# Altium PCB MPPT_V1.0.1.PcbDoc (part 2 of 2)
Units mm, origin at the board's own origin, x right, y up, seen from the top; angles counter-clockwise.
Board outline 82 x 82 mm, 4 copper layers (Top Layer, GND Plane, PWR Plane, Bottom Layer), stack 1.641 mm thick; 90 components, 70 nets, 305 pads, 127 vias.
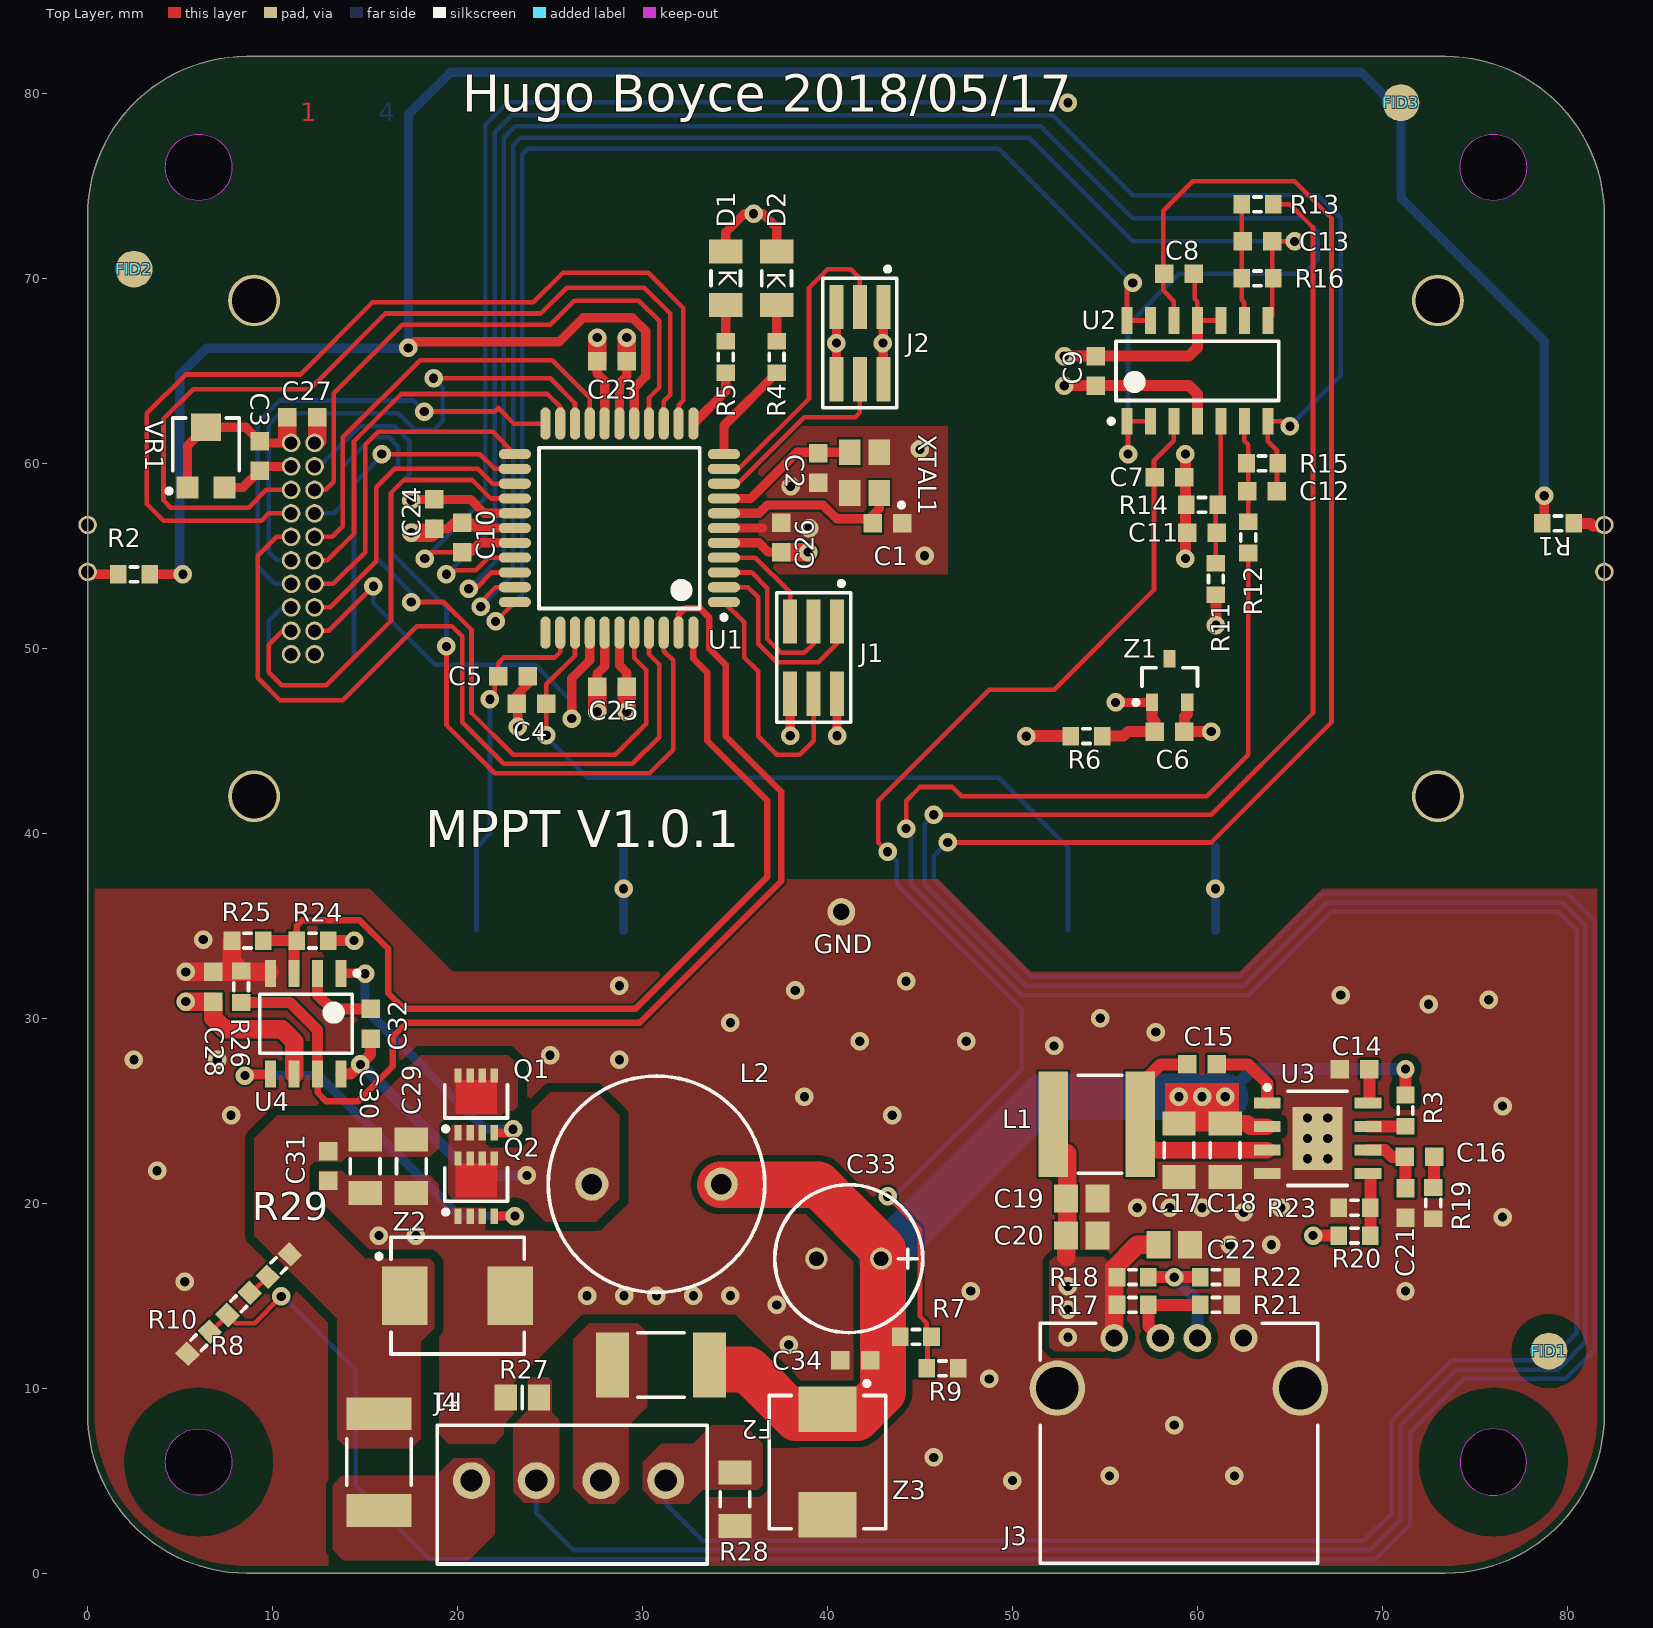
[diagram p0: Top Layer view]

## Via types
v1: diameter 1, hole 0.5, Top Layer to Bottom Layer, tented both sides, 127 vias

## Nets (pads, with @x,y where several pads share a name; then routed paths per layer and width w, separated by ;. In a path a pad name is that pad's centre, name@x,y a point inside that pad or via, vN(x,y) a via of type N, cw(c..) or ccw(c..) an arc to the next point about the centre after c; other vN are vias at no path point) (continued)
NetC15_1: (continued)
  Top Layer w0.9: L1.2@57,23 57.5,23 57.635,22.865 U3.3
NetC15_2: C15.2 U3.1 | length 4.2
  Top Layer w0.65: C15.2 62.75,27.5 63.775,26.475 U3.1
NetC16_1: C16.1 C21.1 U3.6 | length 3.8
  Top Layer w0.65: U3.6 70.146,22.865 70.511,22.5 C16.1 71.25,22.45 C21.1
NetC16_2: C16.2 R19.1 | length 1.6
  Top Layer w0.65: R19.1@72.8,20.9 C16.2
NetC32_1: C32.1 U4.2 | length 4.3
  Top Layer w0.6: U4.2 12.435,31.265 13.2,30.5 C32.1
NetC32_2: C32.2 L2.1 Q1.1 Q1.2 Q1.3 Q2.5 Q2.6 Q2.7 Q2.8 U4.8 | length 14.4
  Top Layer w0.6: U4.8 14.225,26.975 15.3,28.05 C32.2
  Bottom Layer w0.6: v1(14.75,27.5) 14.8,27.5 20,22.3 20.8,21.5 v1(23.75,21.5)
NetD1_2: D1.2 R5.2 | length 1.9
  Top Layer w0.5: R5.2 D1.2
NetD2_2: D2.2 R4.2 | length 1.9
  Top Layer w0.5: R4.2 D2.2
NetDS1_22: DS1.22 R1.2 | length 1.7
  Top Layer w0.6: R1.2 81.25,56.75 81.38,56.62 DS1.22@82,56.62
NetDS1_24: DS1.24 R2.2 | length 1.6
  Top Layer w0.5: DS1.24@0.08,54 R2.2
NetF1_1: F1.1 J4.1
NetF2_1: F2.1 J4.3
NetFID: FID1.0
NetJ3_2: J3.2 R17.1 R21.2 | length 4.9
  Top Layer w0.65: J3.2 57.35,13.36 R17.1 R21.2
NetJ3_3: J3.3 R18.1 R22.2 | length 6.6
  Top Layer w0.65: R18.1 v1(58.75,16) R22.2
  Bottom Layer w0.65: v1(58.75,16) 60,14.75 J3.3
NetQ1_4: Q1.4 U4.1 | length 14.8
  Top Layer w0.5: U4.1 v1@14.975,32.425 ; Q1.4@22.1,23.8 v1@23,23.8
  Bottom Layer w0.5: v1(15,32.4) 15,30.5 21.5,24 v1(23,24)
NetQ2_4: Q2.4 U4.5 | length 20.1
  Top Layer w0.5: v1@8.575,26.975 U4.5 ; Q2.4@22.1,19.3 v1(23.1,19.3)
  Bottom Layer w0.5: v1(8.5,26.9) 12.5,26.9 20.1,19.3 v1(23.1,19.3)
NetR3_1: R3.1 U3.7 | length 2
  Top Layer w0.65: U3.7 R3.1@71.235,24.135
NetR4_1: R4.1 U1.11 | length 5.6
  Top Layer w0.5: U1.11 34.4,62.05 R4.1
NetR5_1: R5.1 U1.12 | length 3.5
  Top Layer w0.5: U1.12 34.5,63.9 R5.1
NetR8_2: R8.2 R29.1 | length 1.3
  Top Layer w0.25: R8.2 8.853,15.153 R29.1
NetR20_1: R20.1 R23.2 U3.5 | length 3.2
  Top Layer w0.65: R20.1 U3.5@69.35,21.47
Prog_MISO: J1.1 U1.2 | length 10.9
  Top Layer w0.25: U1.2 35.7,53.3 36.25,52.75 36.25,50.25 37.25,49.25 39.5,49.25 40.52,50.27 J1.1
Prog_MOSI: J1.4 U1.1 | length 14.3
  Top Layer w0.25: U1.1 35.5,51.4 35.5,49.5 36.25,48.75 36.25,45.25 37.25,44.25 38.5,44.25 39.25,45 J1.4
Prog_RESET_N: J1.5 U1.4 | length 5.9
  Top Layer w0.25: U1.4 36.1,54.9 37.98,53.02 J1.5
Prog_SCK: J1.3 U1.3 | length 8.5
  Top Layer w0.25: U1.3 35.9,54.1 36.75,53.25 36.75,50.5 37.5,49.75 38.75,49.75 39.25,50.25
PV_Shunt: J4.2 R13.2 R27.1 | length 185.2
  Top Layer w0.25: v1(45.75,41) 60.75,41 66.25,46.5 66.25,72.75 65,74 R13.2
  Bottom Layer w0.25: J4.2@24.45,4.55 24.25,4.35 24.25,3.25 26.25,1.25 69.35,1.25 71,2.9 71,8 74,11 79.5,11 80.978,12.478 80.978,35.022 79.75,36.25 67,36.25 62.5,31.75 50.75,31.75 45.25,37.25 45.25,40.5 v1(45.75,41)
User_Button_1: C4.1 S1.2 S1.4 U1.36 | length 41.6
  Top Layer w0.25: v1(24.8,45.3) C4.1 24.8,48.05 26.35,49.6 U1.36
  Bottom Layer w0.25: v1@24.6,45.4 27,43 49.25,43 53,39.25 S1.4@53,34.75
User_Button_2: C5.1 S2.2 S2.4 U1.35 | length 19.2
  Top Layer w0.25: v1@22,47.25 22,48.3 C5.1 ; C5.1@22.2,48.75 22.2,49.2 22.5,49.5 25.25,49.5 25.55,49.8 U1.35
  Bottom Layer w0.25: S2.4 S2.2 21.75,39.975 v1(21.75,47.25)
User_RXD: J2.4 U1.9 | length 10.7
  Top Layer w0.25: U1.9 35.15,58.9 38.75,62.5 41.5,62.5 41.75,62.75 J2.4
User_TXD: J2.3 U1.10 | length 17.1
  Top Layer w0.25: U1.10 35.2,59.7 39,63.5 39,69.5 40,70.5 41.25,70.5 41.75,70 J2.3
V_Batt: C17.2 C18.2 C33.2 C34.2 F2.2 L2.2 R3.2 R7.2 U3.2 Z3.1 | length 67.8
  Top Layer w0.65: R3.2 v1(71.25,27.25)
  Top Layer w0.9: C17.2 C18.2 62.685,24.315 62.865,24.135 U3.2
  Top Layer w1: Z3.1@40,8.4 Z3.1
  Top Layer w2.5: F2.2@34.052,11 35.7,11 38.3,8.4 40,8.4 41.6,8.4 43,9.8 43,17.5 39.5,21 L2.2@34.2,21
  Bottom Layer w0.65: v1(61.5,25.75) 63,27.25 v1(71.25,27.25)
  Bottom Layer w2.5: C33.2 51.65,25.75 v1(59,25.75) v1(60.25,25.75) v1(61.5,25.75)
V_PV: C29.1 C30.1 C31.2 F1.2 Q1.5 Q1.6 Q1.7 Q1.8 R29.2 Z2.1
VCC: 
pads on no net: DS1.19 DS1.20 DS1.25 DS1.26 DS1.27 DS1.28 FID2.0 FID3.0 U1.34 Z1.3

## Polygon pours and split planes (outlines as drawn)
GND on GND Plane "GND_L02_P000" (solid, remove dead copper, pour order 0): 8.6,0 cw(c8.6,8.6) 0,8.6 0,37 15.25,37 19.75,32.5 31,32.5 36,37.5 35.5,38 30.75,33.25 20,33.25 15.5,37.75 0,37.75 0,73.4 cw(c8.6,73.4) 8.6,82 73.4,82 cw(c73.4,73.4) 82,73.4 82,37.75 66.5,37.75 62,33.25 51.25,33.25 46.5,38 46,37.5 51,32.5 62.25,32.5 66.75,37 82,37 82,8.606 cw(c73.4,8.6) 73.4,0
4.096V on PWR Plane "4V1_Plane" (solid, remove dead copper, pour order 4): 51.75,44.182 51.75,82 73.4,82 cw(c73.4,73.4) 82,73.4 82,59.403 80.2,57.603 80.2,44.182
5V on PWR Plane "5V_Plane" (solid, remove dead copper, pour order 2): 8.6,0 cw(c8.6,8.6) 0,8.6 0,37 15.25,37 19.75,32.5 31,32.5 36,37.5 35.5,38 30.75,33.25 20,33.25 15.5,37.75 0,37.75 0,73.4 cw(c8.6,73.4) 8.6,82 51.75,82 51.75,44.25 82,44.25 82,37.75 66.5,37.75 62,33.25 51.25,33.25 46.5,38 46,37.5 51,32.5 62.25,32.5 66.75,37 82,37 82,8.6 cw(c73.4,8.6) 73.4,0
5V on Top Layer "5V_L01_P006" (solid, remove dead copper, pour order 6): 55.5,16.5 54.9,17.1 52.261,17.1 52,16.839 52,12.25 52.25,12 55,12 55.5,12.5 55.5,13.5
GND on Top Layer "GND_L01_P030" (solid, remove dead copper, pour order 30): 0,7.7 0,37 15.25,37 19.75,32.5 31,32.5 36,37.5 46,37.5 51,32.5 62.25,32.5 66.75,37 82,37 82,8.6 cw(c73.4,8.6) 73.4,0 33.5,0 33.5,6.75 38.3,6.75 38.3,11.97 35.5,14.67 35.5,16.75 31.75,19.75 31.75,23 13,23 13,0 7.7,0 cw(c8.661,8.661)
GND on Top Layer "GND_L01_P026" (solid, remove dead copper, pour order 26): 52.75,29.75 72.75,29.75 75,27.5 75,16 69.75,10.75 52.75,10.75 48,15.5 48,25
GND on Top Layer "GND_L01_P024" (solid, remove dead copper, pour order 24): 19,7.5 19.5,7 22,7 22.5,7.5 22.5,8 23,8.5 23,10.25 25,12.25 26.75,14 35,14 37,12 38.5,10.5 40.5,10.5 40.5,17.5 38.75,19.25 33.25,19.25 32.5,20 32.5,23.5 29.25,23.5 29.25,20 27.75,18.5 21.5,18.5 21.5,19.75 19.75,19.75 19,20.5 19,21 18.5,21.5 14,21.5 13.5,22 12.25,22 12.25,20 15,17.25 18.75,17.25 19,17 19,12
GND on Top Layer "Top Layer-GND" (solid, remove dead copper, pour order 8): 46.5,62 46.5,54 36.25,54 36.25,62
NetF1_1 on Top Layer "NETF1_1_L01_P010" (solid, remove dead copper, pour order 10): 22,2.1 22,5.5 21.3,6.2 19.8,6.2 18.85,5.25 13.75,5.25 13.25,4.75 13.25,1.25 13.8,0.7 20.6,0.7
PV_Shunt on Top Layer "PV_SHUNT_L01_P012" (solid, remove dead copper, pour order 12): 24.9,3.8 25.5,4.4 25.5,8.3 25.1,8.7 25.1,10.4 24.9,10.6 24,10.6 23.8,10.4 23.8,8.8 23,8 23,4.4 23.6,3.8
NetF2_1 on Top Layer "NETF2_1_L01_P014" (solid, remove dead copper, pour order 14): 26.25,4.625 27.125,3.75 28.5,3.75 29.25,4.5 29.25,8 30.25,9 30.25,13 29.75,13.5 27.109,13.5 26.25,12.641 26.25,8.25
Batt_Shunt on Top Layer "BATT_SHUNT_L01_P016" (solid, remove dead copper, pour order 16): 32.5,3.75 33.25,4.5 36.25,4.5 36.5,4.75 36.5,7 35.5,8 33.75,8 32.75,7 31,7 30,6 30,4.5 30.75,3.75
V_PV on Top Layer "V_PV_L01_P018" (solid, remove dead copper, pour order 18): 17.5,6.75 18,7.25 18,12.5 18.75,13.25 18.75,16.75 18.5,17 15,17 12,20 12,22 12.25,22.25 13.75,22.25 14,22.5 18.5,22.5 19,23 19,24.25 19.5,24.75 22.75,24.75 23.25,25.25 23.25,27.5 22.75,28 18,28 14.75,24.75 10.25,24.75 9,23.5 9,18.25 13.5,13.75 13.5,7.25 14,6.75
NetC32_2 on Top Layer "NETC32_2_L01_P022" (solid, remove dead copper, pour order 22): 19.5,24 19.5,20.5 19.75,20.25 23.5,20.25 24.75,19 27.5,19 28.75,20.25 28.75,24.75 27.5,26 25,26 24,25 24,23.5 23.5,23 21.75,23 21.5,23.25 21.5,24 21.25,24.25 19.75,24.25
GND on Bottom Layer "GND_L04_P028" (solid, remove dead copper, pour order 28): 0,8.6 0,37 15.25,37 19.75,32.5 31,32.5 36,37.5 46,37.5 52.5,31 60.75,31 66.75,37 82,37 82,8.6 cw(c73.4,8.6) 73.4,0 8.6,0 cw(c8.6,8.6)

## Other copper
Top Layer:
  rectangle net V_Batt: 58.25,24 62.25,26.5
  text "1" at 11.5,78.5 h1.02
GND Plane:
  text "2" at 11.5,78.5 h1.02
PWR Plane:
  text "3" at 11.5,78.5 h1.02
Bottom Layer:
  text "4" at 15.75,78.5 h1.02

## Silkscreen, mask and mechanical layers (free items; w line width, h text height)
Top Overlay:
  text "Hugo Boyce 2018/05/17" at 20.25,79 h2
  text "MPPT V1.0.1" at 18.25,39.25 h2
  text "GND" at 39.25,33.5 h1.02
Bottom Overlay:
  circle w0.254: c57,37 r1.65
  circle w0.254: c25,37 r1.65
  text "GND" at 42,33.5 h1.02
PCB Outline:
  circle w0.2: c6,6 r1.8
  circle w0.2: c6,76 r1.8
  circle w0.2: c76,76 r1.8
  circle w0.2: c76,6 r1.8
  lines w0.2: 0,8.6 ccw(c8.6,8.6) 8.6,0 73.4,0 ccw(c73.4,8.6) 82,8.6 82,73.4 ccw(c73.4,73.4) 73.4,82 8.6,82 ccw(c8.6,73.4) 0,73.4 0,8.6
Mechanical Details:
  circle w0.2: c6,76 r4
  circle w0.2: c76,76 r4
  circle w0.2: c76,6 r4
  circle w0.2: c6,6 r4

## Text inside footprints (layer, text, board x,y; h text height)
D1: Top Overlay "K" at 34.125,70.5 h1.02 r270
D2: Top Overlay "K" at 36.75,70.35 h1.02 r270